# Altium PCB PCB1.PcbDoc
Units mm, origin at the board's own origin, x right, y up, seen from the top; angles counter-clockwise.
Board outline 55.75 x 32 mm, 2 copper layers (Top Layer, Bottom Layer); 11 components, 7 nets, 38 pads, 0 vias.
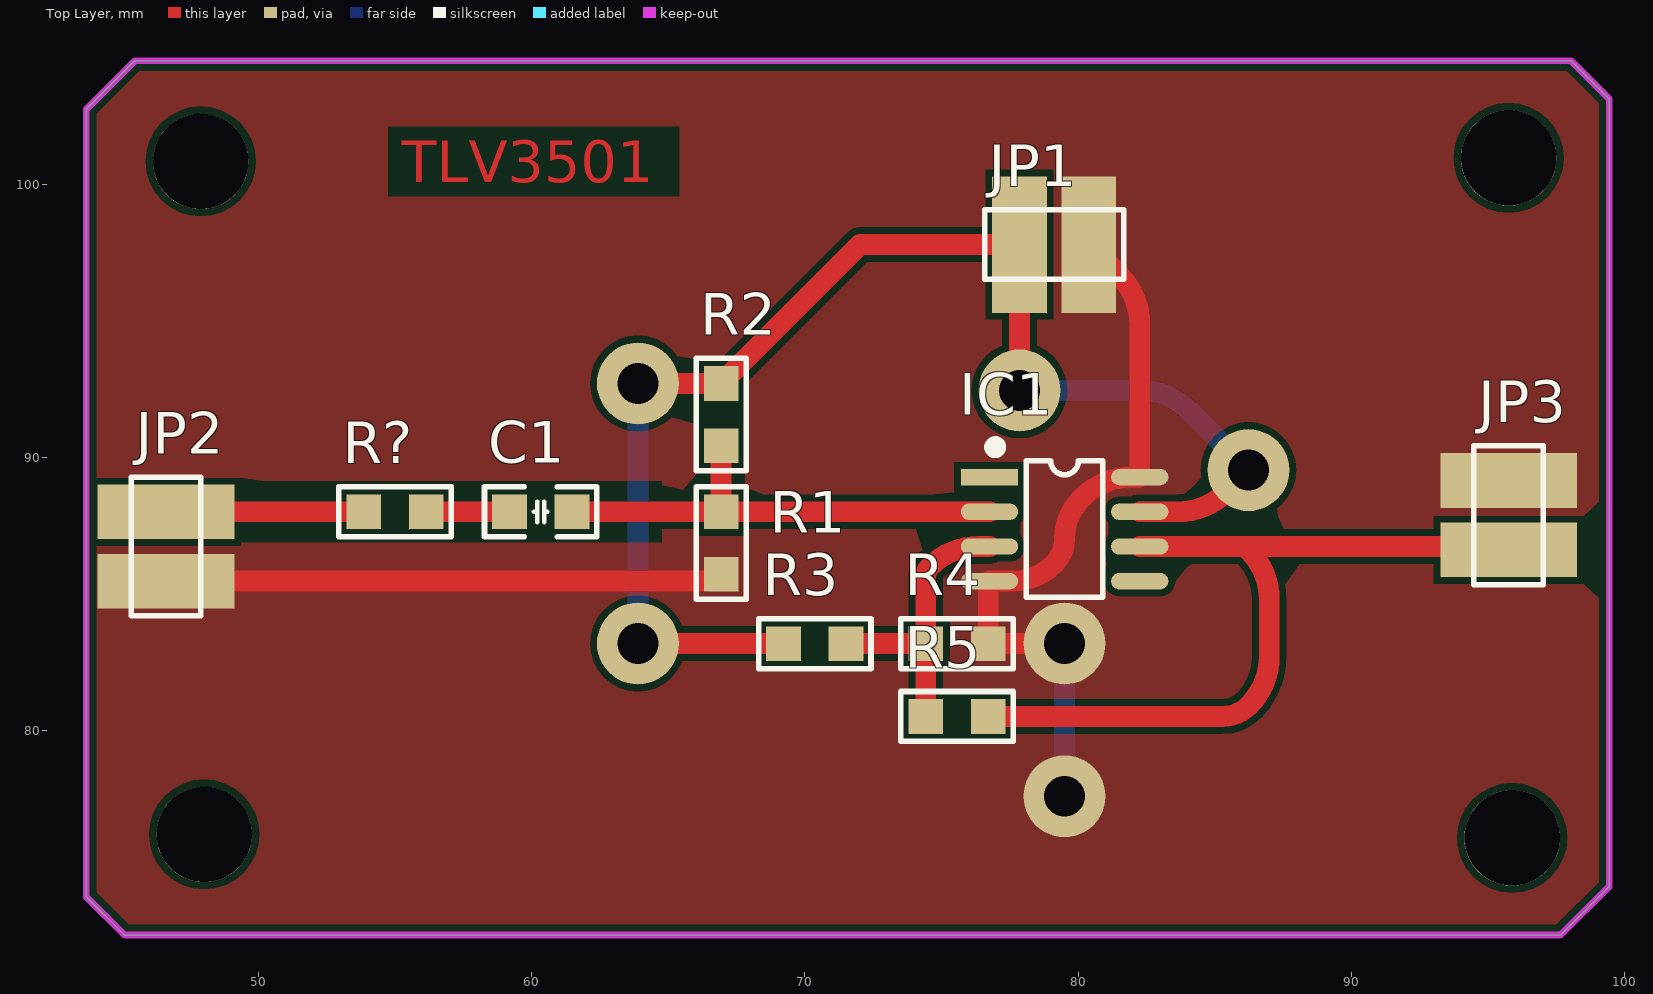
[diagram p0: Top Layer view]
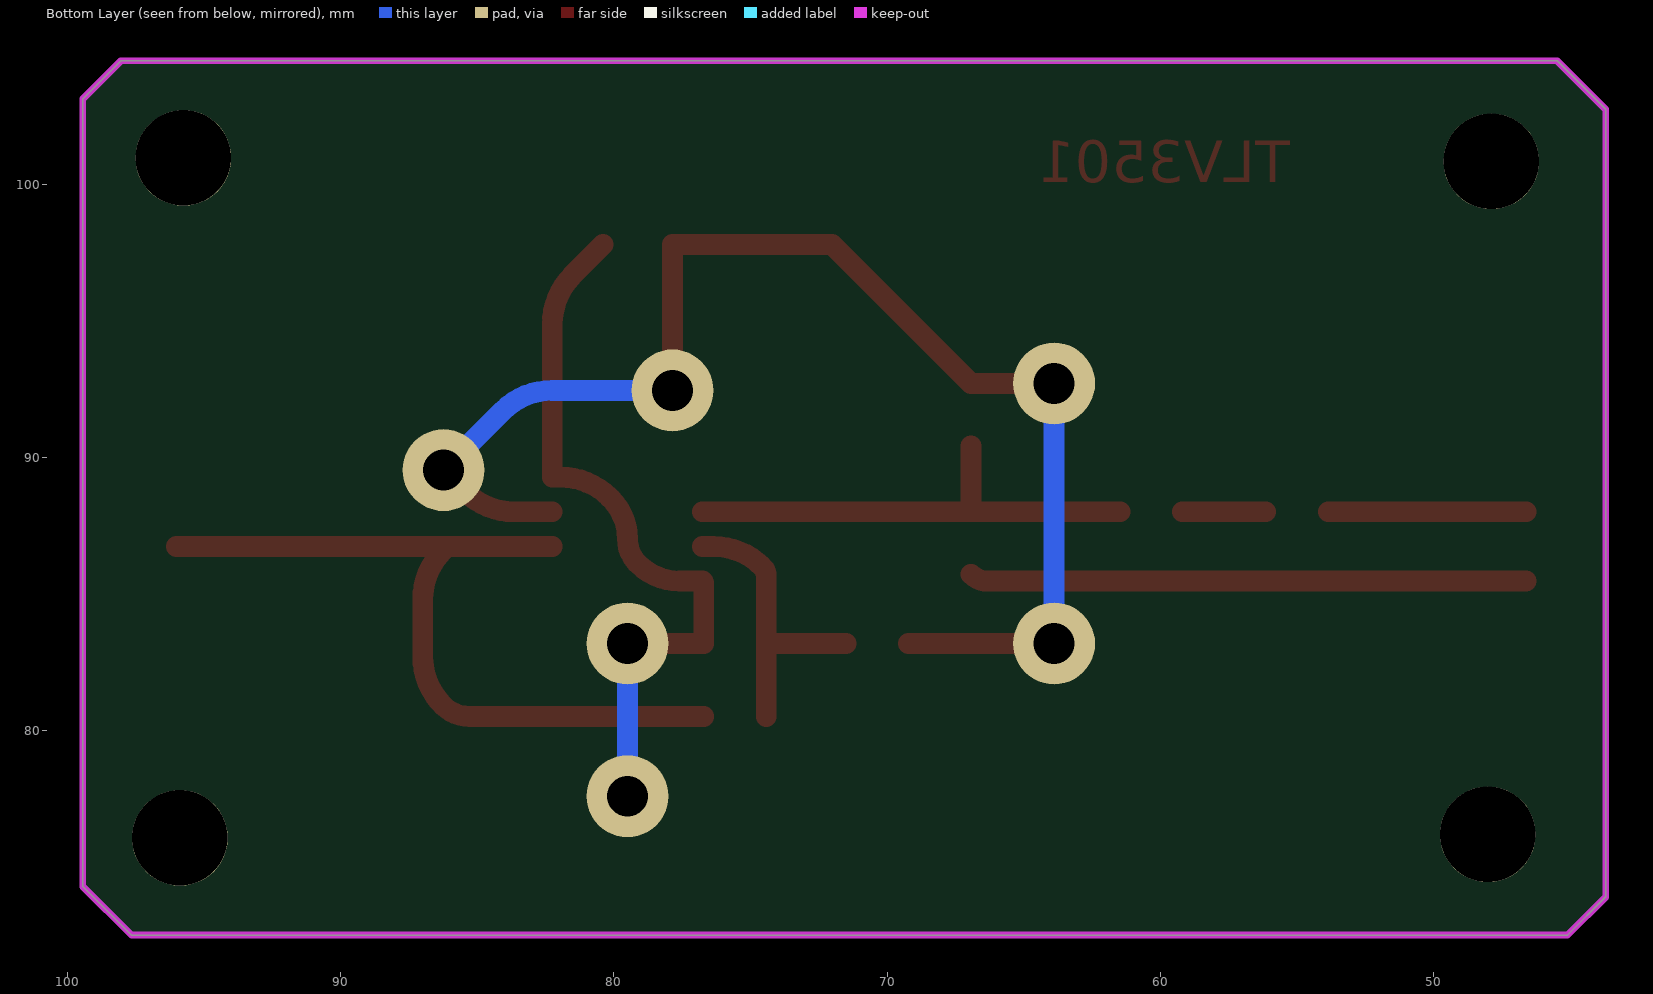
[diagram p1: Bottom Layer view, seen from below]

## Layer stack, top to bottom
Top Solder: solder mask 0.0102, Solder Resist, Dk 3.5
Top Layer: signal copper 0.0356
Dielectric 1: dielectric 0.32, FR-4, Dk 4.8
Bottom Layer: signal copper 0.0356
Bottom Solder: solder mask 0.0102, Solder Resist, Dk 3.5

## Board outline
45.085,72.517 43.688,73.914 43.688,102.743 45.466,104.521 98.044,104.521 99.441,103.124 99.441,74.295 97.663,72.517

## Design rules (kind name [scope] priority, off if disabled: settings)
Clearance [All] p1: gap=0.254
PlaneConnect [All] p1: planeconnectstyle=Direct reliefexpansion=0.508 reliefentries=4 reliefconductorwidth=0.254 reliefairgap=0.254
PolygonConnect [All] p1: connectstyle=Direct reliefconductorwidth=0.254 reliefentries=4 polygonreliefangle="90 Angle" airgapwidth=0.254
RoutingVias [All] p1: holewidth=0.711 width=1.27 viastyle="Through Hole" minholewidth=0.711 minwidth=1.27 maxholewidth=0.711 maxwidth=1.27
SolderMaskExpansion [All] p1: expansion=0.102
Width [All] p1: maxlimit=1.27 minlimit=0.254 preferedwidth=0.762 minimp=50.000000 maximp=50.000000 favimp=50.000000
29 further rules are at their usual default settings.

## Components (designator, comment, footprint, x,y, rotation, side; value= is the part's Value field where it differs from the comment)
C1 "104" "C 0805_M" 60.325,88.011 r0 top
IC1 "24Cxx" SOP8_M 79.502,87.376 r0 top
JP1 "HDR-1X2" HDR2.54-LI-2P 79.121,97.79 r180 top
JP2 "HDR-1X2" HDR2.54-LI-2P 46.609,86.741 r90 top
JP3 "HDR-1X2" HDR2.54-LI-2P 95.758,87.884 r270 top
R1 "1K" "R 0805_M" 66.929,86.868 r270 top
R2 "1K" "R 0805_M" 66.929,91.567 r270 top
R3 "51R" "R 0805_M" 70.358,83.185 r180 top
R4 "51R" "R 0805_M" 75.565,83.185 r180 top
R5 "1K" "R 0805_M" 75.565,80.518 r180 top
R? "1K" "R 0805_M" 54.991,88.011 r180 top

## Footprints (in the part's own frame and the unit in brackets; to place one, negate y for a bottom-side part, rotate by r counter-clockwise, add the part's x,y. Pads: shape width x height; smd on the part's side, far side on the other; paste and mask are expansions set on the pad)
"C 0805_M" [mil] "无极性贴片电容"
  rect 50x50 smd: 1(-45,0) 2(45,0)
  silkscreen extent -81,-36 81,36, body extent -39,-24 39,24, height 20
HDR2.54-LI-2P [mm] "排针，2脚"
  rect 2x5 smd: 1(-1.27,0) 2(1.27,0)
  silkscreen extent -2.54,-1.27 2.54,1.27, body extent -2.54,-1.27 2.54,1.27, height 8.5
"R 0805_M" [mil] "1/8W贴片电阻"
  rect 50x50 smd: 1(-45,0) 2(45,0)
  silkscreen extent -81,-36 81,36, body extent -39,-25 39,25, height 20
SOP8_M [mm] "5*6*1.8mm（长宽高）"
  rect 2.1x0.6 smd: 1(-2.75,1.905)
  oval 2.1x0.6 smd: 2(-2.75,0.635) 3(-2.75,-0.635) 4(-2.75,-1.905) 5(2.75,-1.905) 6(2.75,-0.635) 7(2.75,0.635) 8(2.75,1.905)
  silkscreen extent -2.69,-2.5 1.4,3.15, body extent -3,-2.5 3,2.5, height 1.9

## Part data
C1: library part C, "无极性贴片电容"
IC1: "外置EEPROM"
JP1 JP2 JP3: library part "Header 2", "2P接插件"
R1 R2 R3 R4 R5 R?: library part R, "贴片电阻"

## Free pads (board coordinates)
  round 3 hole 1.5: 2(63.881,92.71) 3(63.881,83.185) 4(79.502,83.185) 5(79.502,77.597) 6(86.233,89.535) 7(77.851,92.456)
  round 3.5 hole 3.5: 8(47.879,100.838) 9(48.006,76.2) 10(95.758,100.965) 11(95.885,76.073)

## Nets (pads, with @x,y where several pads share a name; then routed paths per layer and width w, separated by ;. In a path a pad name is that pad's centre, name@x,y a point inside that pad or via, vN(x,y) a via of type N, cw(c..) or ccw(c..) an arc to the next point about the centre after c; other vN are vias at no path point)
GND: IC1.4 IC1.8 JP1.1 JP2.1 JP3.1 pad.4 pad.5 R1.2 R4.1 | length 47.8
  Top Layer w0.762: JP2.1 66.316,85.471 ccw(c66.316,86.338) R1.2 ; pad.4 R4.1 76.708,85.365 cw(c76.858,85.365) IC1.4 77.588,85.471 ccw(c77.588,87.639) 79.121,86.106 ccw(c78.201,87.026) 79.502,87.026 cw(c81.574,87.026) 80.109,88.491 80.155,88.537 cw(c81.951,86.741) 81.951,89.281 IC1.8 82.252,94.877 ccw(c79.712,94.877) 81.508,96.673 JP1.1
  Bottom Layer w0.762: pad.5 pad.4
NetC1_1: C1.1 R?.1 | length 3
  Top Layer w0.762: R?.1 C1.1
NetC1_2: C1.2 IC1.2 R1.1 R2.2 | length 17.7
  Top Layer w0.762: C1.2 R1.1 ; R2.2 R1.1 ; IC1.2 R1.1
NetIC1_3: IC1.3 R3.1 R4.2 R5.2 | length 10.8
  Top Layer w0.762: R3.1 R4.2 ; R5.2 R4.2 ; IC1.3 76.363,86.741 ccw(c76.363,84.201) 74.567,85.997 74.549,85.979 ccw(c74.856,85.672) 74.422,85.672 R4.2
NetIC1_6: IC1.6 JP3.2 R5.1 | length 29.7
  Top Layer w0.762: R5.1 85.288,80.518 ccw(c85.288,81.88) 86.251,80.917 ccw(c84.455,82.713) 86.995,82.713 86.995,84.8 ccw(c84.455,84.8) 86.251,86.596 86.106,86.741 ; IC1.6 86.106,86.741 ; JP3.2@96.012,86.741 86.106,86.741
NetJP2_2: JP2.2 R?.2 | length 7.2
  Top Layer w0.762: JP2.2 R?.2
VCC: IC1.7 JP1.2 pad.2 pad.3 pad.6 pad.7 R2.1 R3.2 | length 50.3
  Top Layer w0.762: pad.3 R3.2 ; pad.2 R2.1 72.009,97.79 JP1.2 pad.7 ; IC1.7 83.657,88.011 ccw(c83.657,90.551) 85.453,88.755 pad.6
  Bottom Layer w0.762: pad.3 pad.2 ; pad.7 82.26,92.456 cw(c82.26,89.916) 84.056,91.712 pad.6
pads on no net: IC1.1 IC1.5

## Polygon pours and split planes (outlines as drawn)
GND on Top Layer "Keep-Out Layer-No Net" (solid, remove dead copper, pour order 24): 39.37,69.723 39.388,69.741 cw(c41.184,67.945) 41.184,70.485 112.522,70.485 112.522,95.595 ccw(c109.982,95.595) 111.778,97.391 101.092,108.077 100.947,107.932 cw(c99.151,109.728) 99.151,107.188 39.243,107.188

## Keep-outs
Keep-Out Layer:
  the board outline again, w0.254

## Other copper
Top Layer:
  pour cut-out: 49.276,88.773 cw(c50.366,88.88) 49.276,88.988 cw(c50.119,89.071) 49.276,89.154 cw(c49.467,87.222) 49.657,89.154 cw(c49.847,87.222) 50.038,89.154 57.404,89.154 64.77,89.154 64.77,86.868 49.276,86.868
  pour cut-out: 99.441,87.63 98.298,87.63 98.298,85.471 99.441,85.471
  pour cut-out: 43.561,86.741 44.323,86.741 44.323,89.027 43.561,89.027
  text "TLV3501" at 55.245,100.076 h1.52